# EAGLE board usnoobie (EAGLE 5.10)
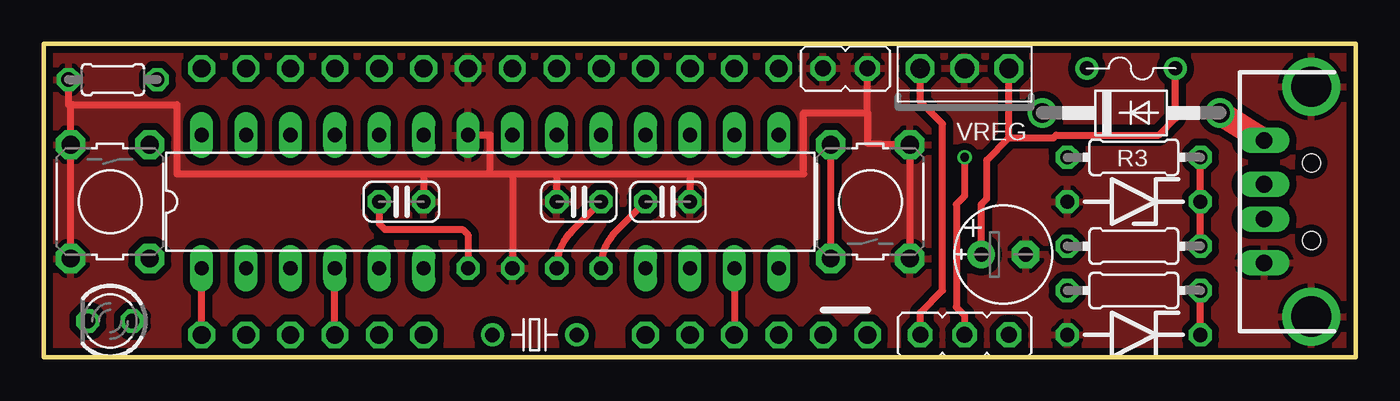
[diagram p0: board, top side]
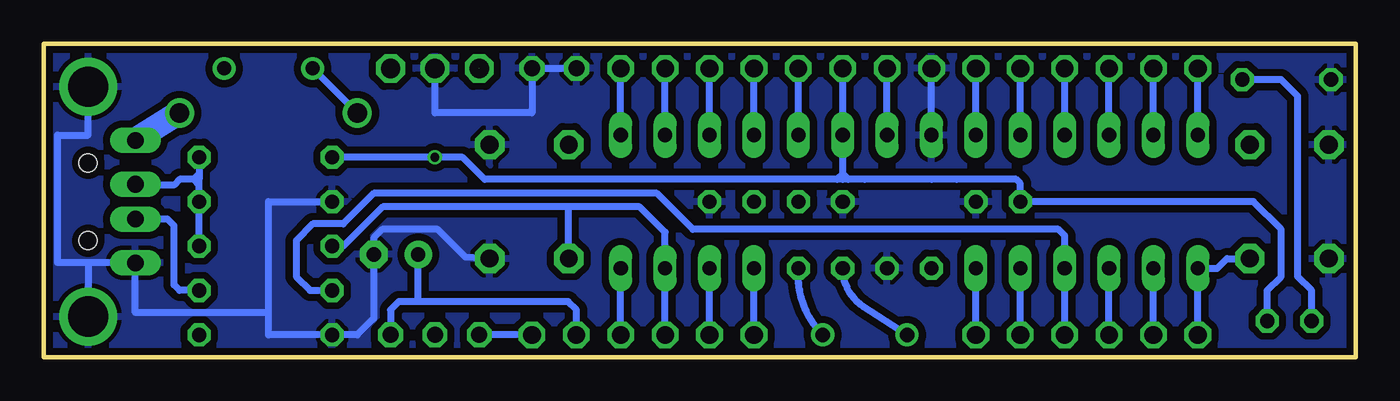
[diagram p1: board, bottom side, seen from below]

Size 75.08 x 17.93 mm. Coordinates in mm from the lower left corner, seen from the top.
Outline: 75.08,0 75.08,17.93 0,17.93 0,0 75.08,0
Copper layers (1*16): Top 0.035mm / dielectric 1.5mm / Bottom 0.035mm
Design rules "Fusion_eagle_rule_v1.1": minimum track width 6mil, minimum drill 12mil, track to track 6mil, track to pad 6mil, pad to pad 6mil, via to via 6mil, smd to smd 0mil, copper to edge 10mil, drill to drill 10mil, minimum pad ring 10mil, minimum via ring 6mil, stop-mask expansion 2mil, vias tented up to drill 100mil, thermal gap 10mil
Holes 1.02 mm at 72.54,11.11 72.54,6.67

## Footprints (pad centres in the part's own frame; a part is rotated, then mirrored left to right if it is on the bottom)
C025-024X044 = drill 0.813 octagon: 1 -1.27,0; 2 1.27,0
E2,5-6E = drill 0.813 pad 1.575 round: + -1.27,0 | drill 0.813 pad 1.575 octagon: - 1.27,0
ZDIO-7.5 = drill 0.813 octagon: A 3.81,0; C -3.81,0
DO41-10 = drill 1.118 round: A 5.08,0; C -5.08,0
PTC = drill 0.8 round: P$1 -2.54,0; P$2 2.54,0
DIL28-3 = drill 0.813 long: 1 -16.51,-3.81; 2 -13.97,-3.81; 3 -11.43,-3.81; 4 -8.89,-3.81; 5 -6.35,-3.81; 6 -3.81,-3.81; 11 8.89,-3.81; 12 11.43,-3.81; 13 13.97,-3.81; 14 16.51,-3.81; 15 16.51,3.81; 16 13.97,3.81; 17 11.43,3.81; 18 8.89,3.81; 19 6.35,3.81; 20 3.81,3.81; 21 1.27,3.81; 22 -1.27,3.81; 23 -3.81,3.81; 24 -6.35,3.81; 25 -8.89,3.81; 26 -11.43,3.81; 27 -13.97,3.81; 28 -16.51,3.81 | drill 0.813 octagon: 7 -1.27,-3.81; 8 1.27,-3.81; 9 3.81,-3.81; 10 6.35,-3.81
1X06 = drill 1.016 octagon: 1 -6.35,0; 2 -3.81,0; 3 -1.27,0; 4 1.27,0; 5 3.81,0; 6 6.35,0
JP2 = drill 0.914 octagon: 1 -2.54,0; 2 0,0; 3 2.54,0
JP1 = drill 0.914 octagon: 1 0,-1.27; 2 0,1.27
1X14 = drill 1.016 octagon: 1 -16.51,0; 2 -13.97,0; 3 -11.43,0; 4 -8.89,0; 5 -6.35,0; 6 -3.81,0; 7 -1.27,0; 8 1.27,0; 9 3.81,0; 10 6.35,0; 11 8.89,0; 12 11.43,0; 13 13.97,0; 14 16.51,0
LED3MM = drill 0.813 octagon: A -1.27,0; K 1.27,0
HC49U-V = drill 0.813 round: 1 -2.413,0; 2 2.413,0
0204/7 = drill 0.813 octagon: 1 -3.81,0; 2 3.81,0
0204/5 = drill 0.813 octagon: 1 -2.54,0; 2 2.54,0
B3F-10XX = drill 1.016 pad 1.676 octagon: 1 -3.251,2.261; 2 3.251,2.261; 3 -3.251,-2.261; 4 3.251,-2.261
TO220_VREG = drill 1.1 octagon: GND 0,0; IN -2.54,0; OUT 2.54,0
PN87520-S = drill 0.95 long: 1 -3.5,2.71; 2 -1,2.71; 3 1,2.71; 4 3.5,2.71 | drill 2.3 pad 2.9 round: S1 -6.57,0; S2 6.57,0

## Placement (x,y rotation side)
C1  0.1u  [C025-024X044]  20.47,8.89 0 top
C2  4.7u  [E2,5-6E]  54.92,5.87 0 top
C3  0.1u  [C025-024X044]  30.63,8.89 0 top
C4  0.1u  [C025-024X044]  35.71,8.89 180 top
D1  3.6V  [ZDIO-7.5]  62.38,1.27 180 top
D2  3.6V  [ZDIO-7.5]  62.38,8.89 180 top
D3  1N4004  [DO41-10]  62.22,13.97 0 top
F1  PTCPTH  [PTC]  62.22,16.51 180 top
IC2  ATmega328P  [DIL28-3]  25.55,8.89 0 top
JP1  [1X06]  40.79,1.27 0 top
JP2  [JP2]  52.7,1.27 180 top
JP3  [1X06]  15.39,1.27 0 top
JP4  [JP1]  45.87,16.51 90 top
JP9  [1X14]  25.55,16.51 0 top
LED1  [LED3MM]  3.8,2.06 180 top
Q1  [HC49U-V]  28.09,1.27 180 top
R1  68R  [0204/7]  62.38,3.81 0 top
R2  68R  [0204/7]  62.38,6.35 0 top
R3  2.2k  [0204/7]  62.38,11.43 180 top
R4  2.2k  [0204/5]  3.96,15.88 0 top
S1  [B3F-10XX]  47.3,8.89 90 top
S2  [B3F-10XX]  3.8,8.89 270 top
U$1  TO220_VREG  [TO220_VREG]  52.7,16.51 180 top
X2  PN87520-S  [PN87520-S]  72.54,8.89 90 top

## Library data of the parts
C1-C4 R1-R4 = rcl
D1-D3 = diode
F1 = SparkFun
IC2 U$1 = custom_lib
JP1 JP3 JP9 = pinhd-modified
JP2 JP4 = jumper-modified
LED1 = led
Q1 = crystal-modified
S1 S2 = switch-omron-modified
X2 = con-berg-nologo

## Nets
+3V3: C1.1 IC2.7 IC2.20 JP2.2 JP9.9 LED1.A R3.2
+5V: C2.+ F1.P$1 JP1.5 JP2.1 U$1.IN
AREF: IC2.21 JP9.8
D+: D1.C R1.2 X2.2
D-: D2.C R2.2 R3.1 X2.3
GND: C1.2 C2.- C3.1 C4.1 D1.A D2.A IC2.8 IC2.22 JP4.1 JP4.2 JP9.7 R4.1 S1.3 S1.4 S2.3 S2.4 U$1.GND X2.1 X2.S1 X2.S2
N$1: JP1.6 JP2.3 U$1.OUT
N$2: C3.2 IC2.9 Q1.2
N$3: C4.2 IC2.10 Q1.1
N$4: D3.A X2.4
N$5: D3.C F1.P$2
N$7: LED1.K R4.2
PB0: IC2.14 JP1.4
PB1: IC2.15 JP9.14
PB2: IC2.16 JP9.13
PB3: IC2.17 JP9.12
PB4: IC2.18 JP9.11
PB5: IC2.19 JP9.10
PC0: IC2.23 JP9.6
PC1: IC2.24 JP9.5
PC2: IC2.25 JP9.4
PC3: IC2.26 JP9.3
PC4: IC2.27 JP9.2
PC5: IC2.28 JP9.1
PD0: IC2.2 JP3.2
PD1: IC2.3 JP3.3
PD2: IC2.4 JP3.4 R1.1
PD3: IC2.5 JP3.5
PD4: IC2.6 JP3.6
PD5: IC2.11 JP1.1
PD6: IC2.12 JP1.2
PD7: IC2.13 JP1.3 R2.1 S1.1 S1.2
RESET: IC2.1 JP3.1 S2.2

## Tracks (layer width: path | path; a pad name or v marks a point on that pad's centre or on a via)
+3V3  (via drill 0.51)
  Top 0.406: v52.7,11.43 52.7,9.21 52.22,8.73 52.22,2.86 52.7,2.38 JP2.2 | JP2.2 | IC2.7 24.28,6.99 23.96,7.3 19.52,7.3 19.2,7.62 C1.1 | C1.1
  Bottom 0.406: JP9.9 IC2.20 29.36,10.48 | 29.36,10.16 29.36,10.48 | 29.36,10.16 29.68,10.16 | 29.04,10.16 28.09,10.16 24.28,10.16 22.85,10.16 19.42,10.16 19.2,9.94 C1.1 | 29.04,10.16 29.36,10.16 | 29.36,10.48 29.68,10.16 | 29.68,10.16 49.84,10.16 51.11,11.43 v52.7,11.43 R3.2 | 29.04,10.16 29.36,10.48 | LED1.A 5.07,3.81 4.28,4.6 4.28,7.3 5.86,8.89 C1.1 | C1.1
+5V
  Top 0.406: C2.+ 53.65,8.73 53.97,9.05 53.97,11.27 55.23,12.54 | F1.P$1 64.76,13.65 63.81,12.7 57.93,12.7 57.77,12.54 55.23,12.54 | 55.23,12.54 U$1.IN | JP2.1
  Bottom 0.406: JP2.1 55.23,2.7 54.76,3.17 53.65,3.17 | JP1.5 44.6,2.7 45.08,3.17 53.65,3.17 | 53.65,3.17 C2.+
AREF
  Bottom 0.406: IC2.21 JP9.8
D+
  Top 0.406: D1.C R1.2
  Bottom 0.406: R1.2 67.3,3.81 67.62,4.13 67.62,7.52 67.99,7.89 X2.2
D-
  Top 0.406: R2.2 R3.1
  Bottom 0.406: R2.2 D2.C 66.19,9.84 | 66.19,9.84 66.19,10.16 | 66.19,10.48 66.19,10.16 | R3.1 66.19,10.48 | X2.3 69.78,9.84 67.62,9.84 67.3,10.16 66.51,10.16 | 66.19,10.16 66.51,10.16 | 66.19,10.48 66.51,10.16 | 66.19,9.84 66.51,10.16
GND
  Top 0.406: IC2.22 25.55,12.7 25.55,10.48 | 25.55,10.48 | S2.4 1.54,9.68 S2.3 1.54,14.33 | 25.55,10.48 26.82,10.48 | 21.74,10.48 7.61,10.48 7.61,14.45 1.66,14.45 1.54,14.33 | 21.74,10.48 25.55,10.48 | 26.82,10.48 IC2.8 | 1.54,14.33 1.42,14.45 R4.1 | 26.82,10.48 29.36,10.48 | 29.36,10.48 36.98,10.48 | 36.98,10.48 43.49,10.48 43.49,13.97 | 47.14,13.97 JP4.1 | 47.14,13.97 | 43.49,13.97 47.14,13.97 | 43.49,13.97 | 47.14,13.97 47.14,12.22 S1.4 S1.3 | 36.98,10.48 C4.1 | C3.1 | 29.36,10.48 C3.1 | 21.74,10.48 C1.2
  Bottom 0.406: IC2.22 JP9.7 | 62.22,2.54 62.22,1.27 D1.A 57.14,1.27 56.19,2.22 C2.- 56.19,6.83 55.71,7.3 52.54,7.3 50.95,5.71 S1.3 | JP4.2 JP4.1 47.14,13.97 52.7,13.97 U$1.GND | 62.22,2.54 69.84,2.54 69.84,2.63 69.83,2.63 X2.1 72.54,5.39 | D2.A 62.22,8.89 62.22,2.54 | X2.S2 72.54,12.7 74.28,12.7 74.28,5.4 72.54,5.39 | 72.54,5.39 X2.S1
  pour Bottom (isolate 0.406): -0.01,0 -0.01,17.94 75.08,17.94 75.08,0
  pour Top (isolate 0.406): -0.01,0 -0.01,17.94 75.08,17.94 75.08,0
N$1  (1 unrouted)
  Top 0.406: JP2.3 50.16,2.54 51.43,3.81 51.43,13.34 50.16,14.61 U$1.OUT
  Bottom 0.406: JP2.3 | JP1.6 JP2.3
N$2
  Top 0.406: C3.2 | C3.2 30.26,7.25 arc45 IC2.9
  Bottom 0.406: Q1.2 28.16,2.88 arc57 IC2.9
N$3
  Top 0.406: C4.2 32.8,7.25 arc45 IC2.10
  Bottom 0.406: Q1.1 arc44 31.9,4.7 IC2.10
N$4
  Top 1.422: D3.A X2.4
  Bottom 0.406: 69.83,12.42 X2.4 | D3.A 67.32,13.97
  Bottom 1.422: 67.32,13.97 69.83,12.42
N$5
  Bottom 0.406: D3.C F1.P$2
N$7
  Bottom 0.406: R4.2 4.28,15.88 3.32,14.92 3.32,4.6 2.53,3.81 LED1.K
PB0
  Bottom 0.406: JP1.4 IC2.14
PB1
  Bottom 0.406: IC2.15 JP9.14
PB2
  Bottom 0.406: IC2.16 JP9.13
PB3
  Bottom 0.406: IC2.17 JP9.12
PB4
  Bottom 0.406: IC2.18 JP9.11
PB5
  Bottom 0.406: IC2.19 JP9.10
PC0
  Bottom 0.406: IC2.23 JP9.6
PC1
  Bottom 0.406: IC2.24 JP9.5
PC2
  Bottom 0.406: IC2.25 JP9.4
PC3
  Bottom 0.406: IC2.26 JP9.3
PC4
  Bottom 0.406: IC2.27 JP9.2
PC5
  Bottom 0.406: IC2.28 JP9.1
PD0
  Bottom 0.406: JP3.2 IC2.2
PD1
  Bottom 0.406: JP3.3 IC2.3
PD2
  Top 0.406: JP3.4 IC2.4
  Bottom 0.406: R1.1 59.84,3.81 60.63,4.6 60.63,6.67 59.68,7.62 57.93,7.62 56.19,9.37 40,9.37 37.93,7.3 17.01,7.3 16.66,6.95 IC2.4 JP3.4
PD3
  Bottom 0.406: JP3.5 IC2.5
PD4
  Bottom 0.406: JP3.6 IC2.6
PD5
  Bottom 0.406: JP1.1 IC2.11
PD6
  Bottom 0.406: JP1.2 IC2.12
PD7
  Top 0.406: IC2.13 JP1.3 | S1.1 S1.2
  Bottom 0.406: R2.1 57.93,6.35 55.68,8.6 45.08,8.6 | 45.08,8.6 40.98,8.6 39.52,7.14 IC2.13 JP1.3 | S1.1 45.08,5.68 45.08,8.6
RESET
  Top 0.406: JP3.1 IC2.1
  Bottom 0.406: JP3.1 IC2.1 7.93,5.08 7.38,5.64 S2.2

## Text on the board
tNames: VREG | +
tDocu: 5V | C5 | C4 | C3 | C2 | C1 | C0 | G | AR | V+ | B5 | B4 | B3 | B2 | B1 | GND | 3V3 | D0 | D1 | D2 | D3 | D4 | D5 | D6 | D7 | B0 | 5V | 3V3 | Reset | 5V
bDocu: 5V | GND | C5 | C4 | C3 | C2 | C1 | C0 | G | AR | V+ | B5 | B4 | B3 | B2 | B1 | 3V3 | D0 | D1 | D2 | D3 | D4 | D5 | D6 | D7 | B0 | 5V | 5V | Reset